# EAGLE board Solar_Irradiance_Sensor (EAGLE 7.1.0)

Size 100 x 80 mm. Coordinates in mm from the lower left corner, seen from the top.
Outline: 0,0 100,0 100,80 0,80 0,0
Copper layers (1*16): Top 0.035mm / dielectric 1.5mm / Bottom 0.035mm
Design rules "default": minimum track width 10mil, minimum drill 24mil, track to track 8mil, track to pad 8mil, pad to pad 8mil, via to via 8mil, smd to smd 8mil, copper to edge 40mil, drill to drill 8mil, minimum pad ring 10mil, minimum via ring 8mil, stop-mask expansion 4mil, vias tented up to drill 0mil, thermal gap 10mil

## Footprints (pad centres in the part's own frame; a part is rotated, then mirrored left to right if it is on the bottom)
C025-024X044 = drill 0.813 octagon: 1 -1.27,0; 2 1.27,0
DIL14 = drill 0.813 long: 1 -7.62,-3.81; 2 -5.08,-3.81; 3 -2.54,-3.81; 4 0,-3.81; 5 2.54,-3.81; 6 5.08,-3.81; 7 7.62,-3.81; 8 7.62,3.81; 9 5.08,3.81; 10 2.54,3.81; 11 0,3.81; 12 -2.54,3.81; 13 -5.08,3.81; 14 -7.62,3.81
1X02_2.54_SCREWTERM = drill 1.016 square: P1 2.54,0; P2 0,0
2X06 = drill 1.016 octagon: 1 -6.35,-1.27; 2 -6.35,1.27; 3 -3.81,-1.27; 4 -3.81,1.27; 5 -1.27,-1.27; 6 -1.27,1.27; 7 1.27,-1.27; 8 1.27,1.27; 9 3.81,-1.27; 10 3.81,1.27; 11 6.35,-1.27; 12 6.35,1.27
0207/10 = drill 0.813 octagon: 1 -5.08,0; 2 5.08,0
WASP = drill 0.8: A1 10.16,15.24; A2 10.16,12.7; A3 10.16,10.16; A4 10.16,7.62; A5 10.16,5.08; A6 10.16,2.54; A7 10.16,0; A8 10.16,-2.54; A9 10.16,-5.08; A10 10.16,-7.62; A11 10.16,-10.16; A12 10.16,-12.7; S1 -33.02,12.7; S2 -30.48,12.7; S3 -33.02,10.16; S5 -33.02,7.62; S6 -30.48,7.62; S7 -33.02,5.08; S8 -30.48,5.08; S9 -33.02,2.54; S10 -30.48,2.54; S11 -33.02,0; S12 -30.48,0; S13 -33.02,-2.54; S14 -30.48,-2.54; S15 -33.02,-5.08; S16 -30.48,-5.08; S17 -33.02,-7.62; S18 -30.48,-7.62; S19 -33.02,-10.16; S20 -30.48,-10.16; S21 -33.02,-12.7; S22 -30.48,-12.7; S23 -33.02,-15.24; S24 -30.48,-15.24 | drill 0.8 square: S4 -30.48,10.16

## Placement (x,y rotation side)
C1  0.1uF  [C025-024X044]  44.45,50.8 90 top
IC1  LM324N  [DIL14]  33.02,48.26 90 top
JP1  M022.54MM_SCREWTERM  [1X02_2.54_SCREWTERM]  57.15,24.13 0 top
JP4  MAX31865  [2X06]  39.37,67.31 180 top
R1  100k  [0207/10]  55.88,35.56 90 top
R2  100k  [0207/10]  43.18,35.56 270 top
R3  2k  [0207/10]  49.53,35.56 90 top
U$1  WASP  [WASP]  50.8,54.61 0 top

## Library data of the parts
C1 R1-R3 = rcl
IC1 = linear
JP1 = SparkFun-Connectors
JP4 = pinhead
U$1 = wasp

## Nets
5V_SENSOR_PWR: IC1.4 JP4.11 JP4.12 U$1.S22
GND: C1.2 IC1.11 JP1.P2 JP4.9 JP4.10 R3.1 U$1.A6 U$1.S4
GPIO3: JP4.5
GPIO4: JP4.7
INT: JP4.1
MISO: JP4.6 U$1.A12
MOSI: JP4.4 U$1.A11
N$1: IC1.2 R2.1 R3.2
N$2: C1.1 IC1.3 R1.2 U$1.S18
RESET: JP4.3
SCK: JP4.8 U$1.A7
SOLAR_INPUT: JP1.P1 R1.1
SOLAR_OUTPUT: IC1.1 R2.2 U$1.S20
SS: JP4.2 U$1.S12

## Tracks (layer width: path | path; a pad name or v marks a point on that pad's centre or on a via)
5V_SENSOR_PWR  (3 unrouted)
GND  (7 unrouted)
MISO  (1 unrouted)
MOSI  (1 unrouted)
N$1  (2 unrouted)
N$2  (3 unrouted)
SCK  (1 unrouted)
SOLAR_INPUT  (1 unrouted)
SOLAR_OUTPUT  (2 unrouted)
SS  (1 unrouted)